# Altium PCB PCB_2022-01-01_2024-03-15.pcbdoc
Units mil, origin at the board's own origin, x right, y up, seen from the top; angles counter-clockwise.
Board outline 11779.35 x 5222.6 mil, 2 copper layers (Top Layer, Bottom Layer); 63 components, 51 nets, 145 pads, 18 vias.
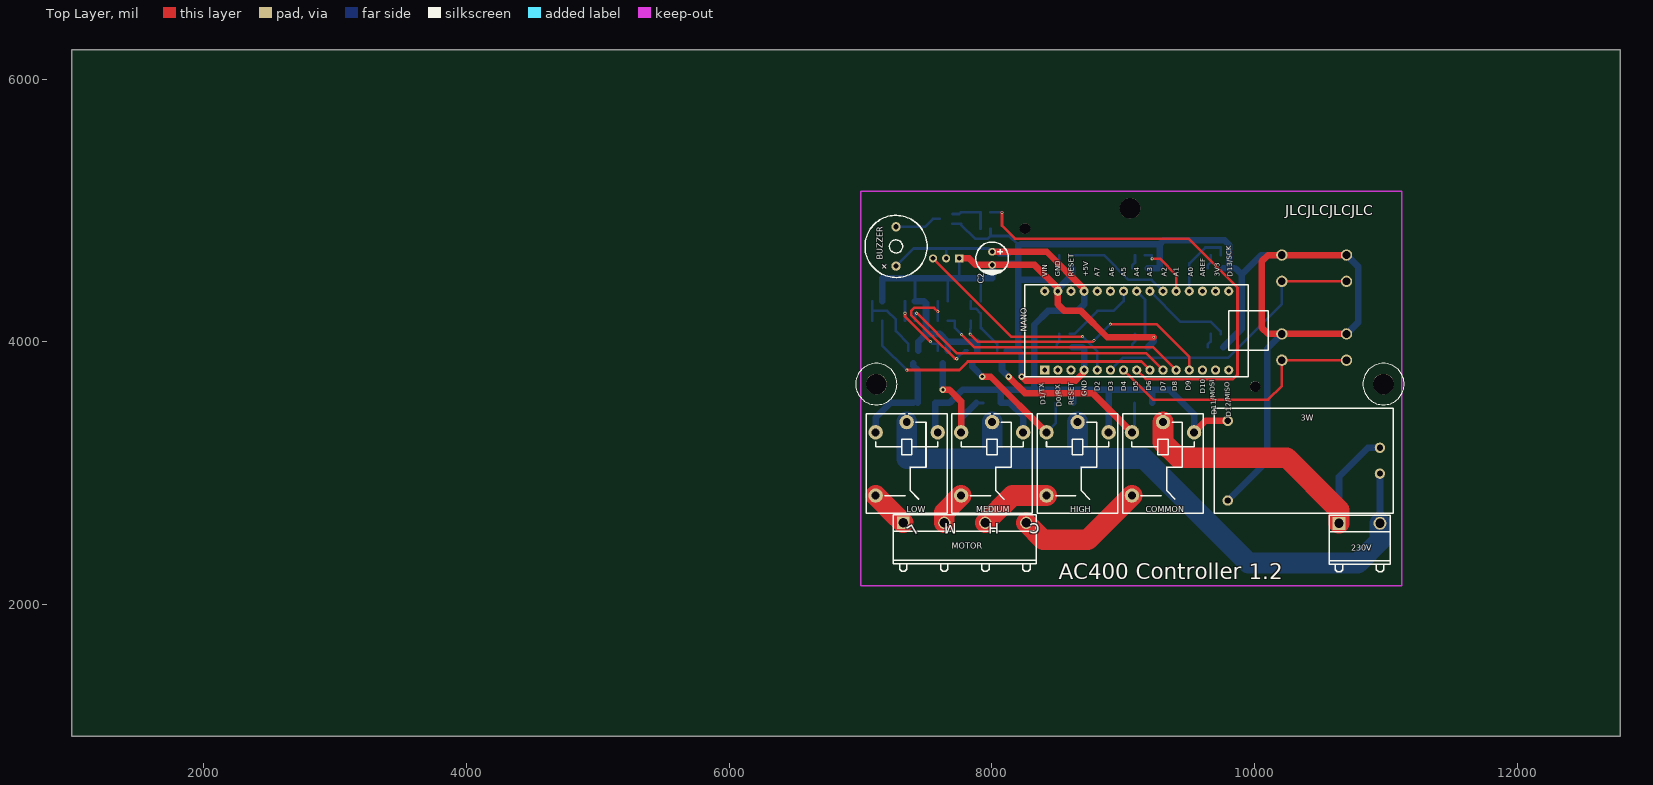
[diagram p0: Top Layer view]
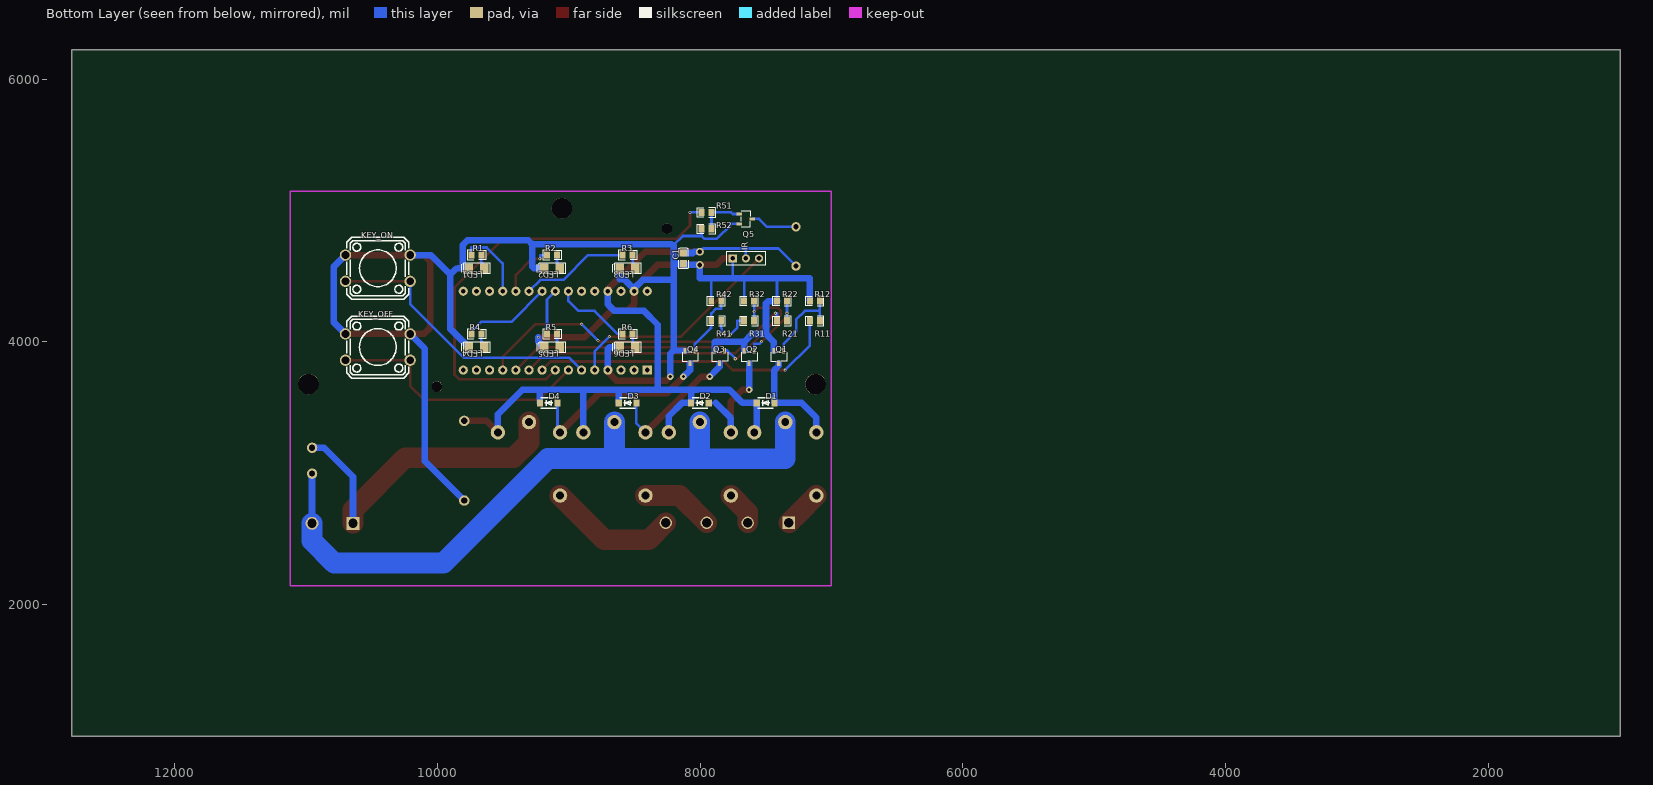
[diagram p1: Bottom Layer view, seen from below]

## Layer stack, top to bottom
Top Layer: signal copper (thickness not stored)
Dielectric: dielectric 12.6, FR-4, Dk 4.8
Bottom Layer: signal copper (thickness not stored)

## Board outline
12779.35,1000 1000,1000 1000,6222.6 12779.35,6222.6

## Components (designator, comment, footprint, x,y, rotation, side; value= is the part's Value field where it differs from the comment)
3W "HLK-PM01" PWRM-TH_HLK-PM01 10372.72,3096.93 r180 top
230V "HDR-F-2.54_1x2" CONN-TH_3(2)P-P3.96_B3PS-VH 10640.44,2620.55 r0 top
BUZZER "TMB12A05" BUZ-TH_BD12.0-P7.60-D0.6-FD 7270.36,4726.85 r90 top
C1 "0.1u" C0805 8126.46,4636.3 r270 bottom
C2 "100u" CAP-D6.3×F2.5 8001.46,4636.3 r270 top
COMMON "SRD-DC5V-SL-A" RELAY-TH_SRD-DCXXV-SL-A 9301.46,3111.3 r270 top
D1 "1N4007W" SOD-123_L2.8-W1.8-LS3.7-RD 7501.46,3536.3 r0 bottom
D2 "1N4007W" SOD-123_L2.8-W1.8-LS3.7-RD 8001.46,3536.3 r0 bottom
D3 "1N4007W" SOD-123_L2.8-W1.8-LS3.7-RD 8551.46,3536.3 r0 bottom
D4 "1N4007W" SOD-123_L2.8-W1.8-LS3.7-RD 9151.46,3536.3 r0 bottom
HIGH "SRD-DC5V-SL-A" RELAY-TH_SRD-DCXXV-SL-A 8651.46,3111.3 r270 top
IR "HDR-M-2.54_1x3" HDR-M-2.54_1X3 7651.46,4636.3 r0 bottom
KEY_OFF "K4-12×12_TH" KEY-TH_4P-L12.0-W12.0-P5.00-LS12.5 10451.46,3961.3 r0 bottom
KEY_ON "K4-12×12_TH" KEY-TH_4P-L12.0-W12.0-P5.00-LS12.5 10451.46,4561.3 r0 bottom
LED1 "LED-0805_R" LED1206-FD_GREEN 9701.46,4561.3 r180 bottom
LED2 "LED-0805_R" LED1206-FD_GREEN 9126.46,4561.3 r180 bottom
LED3 "LED-0805_R" LED1206-FD_GREEN 8551.46,4561.3 r180 bottom
LED4 "LED-0805_R" LED1206-FD_GREEN 9701.46,3961.3 r180 bottom
LED5 "LED-0805_R" LED1206-FD_GREEN 9126.46,3961.3 r180 bottom
LED6 "LED-0805_R" LED1206-FD_GREEN 8551.46,3961.3 r180 bottom
LOW "SRD-DC5V-SL-A" RELAY-TH_SRD-DCXXV-SL-A 7351.46,3111.3 r270 top
MEDIUM "SRD-DC5V-SL-A" RELAY-TH_SRD-DCXXV-SL-A 8001.46,3111.3 r270 top
MOTOR "HDR-F-2.54_1x4" CONN-TH_7(4)P-P3.96_B3PS-VH 7325.48,2624.49 r0 top
NANO "ARDUINO_NANO" ARDUINO_NANO 9101.46,4086.3 r90 top
Q1 "S8050-J3Y 800MA" SOT-23-3_L2.9-W1.6-P1.90-LS2.8-BR 7401.46,3886.3 r270 bottom
Q2 "S8050-J3Y 800MA" SOT-23-3_L2.9-W1.6-P1.90-LS2.8-BR 7626.46,3886.3 r270 bottom
Q3 "S8050-J3Y 800MA" SOT-23-3_L2.9-W1.6-P1.90-LS2.8-BR 7851.46,3886.3 r270 bottom
Q4 "S8050-J3Y 800MA" SOT-23-3_L2.9-W1.6-P1.90-LS2.8-BR 8076.46,3886.3 r270 bottom
Q5 "S8050-J3Y 800MA" SOT-23-3_L2.9-W1.6-P1.90-LS2.8-BR 7651.46,4936.3 r180 bottom
R1 "200" R0805 9701.46,4661.3 r180 bottom
R2 "200" R0805 9126.46,4661.3 r180 bottom
R3 "200" R0805 8551.46,4661.3 r180 bottom
R4 "200" R0805 9701.46,4061.3 r180 bottom
R5 "200" R0805 9126.46,4061.3 r180 bottom
R6 "200" R0805 8551.46,4061.3 r180 bottom
R11 "4k7" R0805 7126.46,4161.3 r0 bottom
R12 "20k" R0805 7126.46,4311.3 r0 bottom
R21 "4k7" R0805 7376.46,4161.3 r0 bottom
R22 "20k" R0805 7376.46,4311.3 r0 bottom
R31 "4k7" R0805 7626.46,4161.3 r0 bottom
R32 "20k" R0805 7626.46,4311.3 r0 bottom
R41 "4k7" R0805 7876.46,4161.3 r0 bottom
R42 "20k" R0805 7876.46,4311.3 r0 bottom
R51 "4k7" R0805 7951.46,4986.3 r0 bottom
R52 "20k" R0805 7951.46,4861.3 r0 bottom
? "" ? 9784.54,5064.1 r0 top
? "" ? 11092.5,4858.78 r0 top
? "" ? 11364.4,4536.3 r0 top
? "" ? 10139.1,4258.82 r0 top
? "" ? 9947.04,4449.35 r0 top
? "" ? 9659.54,4363.57 r0 top
? "" ? 9358.87,4321.29 r0 top
? "" ? 8147.43,2421.28 r0 top
? "" ? 9056,3854.21 r0 top
? "" ? 9065.84,2020.31 r0 top
? "" ? 7065.84,3616.25 r0 top
? "" ? 11149.19,4443.54 r0 top
? "" ? 6933.21,4447.48 r0 top
? "" ? 11277.76,2917.95 r0 top
? "" ? 6806.4,3644.33 r0 top
? "" ? 10440.99,2346.32 r0 top
? "" ? 8031.23,5363.15 r0 top
? "" ? 10093.59,5374.95 r0 top

## Footprints (in the part's own frame and the unit in brackets; to place one, negate y for a bottom-side part, rotate by r counter-clockwise, add the part's x,y. Pads: shape width x height; smd on the part's side, far side on the other; paste and mask are expansions set on the pad)
ARDUINO_NANO [mil]
  rect 70x70 hole 36 paste+0 mask+4: 1(-300,700)
  round 70 hole 36 paste+0 mask+4: 2(-300,600) 3(-300,500) 4(-300,400) 5(-300,300) 6(-300,200) 7(-300,100) 8(-300,0) 9(-300,-100) 10(-300,-200) 11(-300,-300) 12(-300,-400) 13(-300,-500) 14(-300,-600) 15(-300,-700) 16(300,-700) 17(300,-600) 18(300,-500) 19(300,-400) 20(300,-300) 21(300,-200) 22(300,-100) 23(300,0) 24(300,100) 25(300,200) 26(300,300) 27(300,400) 28(300,500) 29(300,600) 30(300,700)
  silkscreen extent -350,-1000 350,850
BUZ-TH_BD12.0-P7.60-D0.6-FD [mm]
  round 1.8 hole 1 paste+0 mask+0.051: 1(-3.8,0) 2(3.8,0)
  silkscreen extent -6,-6 6,6
C0805 [mm]
  rect 1.41x1.35 smd paste-100 mask+0.051: 1(1.03,0) 2(-1.03,0)
  silkscreen extent -1.96,-0.9 1.96,0.9
CAP-D6.3×F2.5 [mil]
  round 60 hole 36 paste+0 mask+4: 1(-50,0) 2(50,0)
  silkscreen extent -124,-124 125,124
CONN-TH_3(2)P-P3.96_B3PS-VH [mm]
  rect 2.5x2.5 hole 1.8 paste+0 mask+0.102: 1(0,0)
  round 2.5 hole 1.8 paste+0 mask+0.102: 2(7.92,0)
  silkscreen extent -1.91,-9.37 9.91,1.53
CONN-TH_7(4)P-P3.96_B3PS-VH [mm]
  rect 2.4x2.4 hole 1.8 paste+0 mask+0.05: 1(0,0)
  round 2.4 hole 1.8 paste+0 mask+0.05: 2(7.92,0) 3(15.84,0) 4(23.76,0)
  silkscreen extent -1.93,-9.37 25.65,1.53
HDR-M-2.54_1X3 [mil]
  rect 62x62 hole 35 paste+0 mask+2: 1(100,0)
  round 62 hole 35 paste+0 mask+2: 2(0,0) 3(-100,0)
  silkscreen extent -150,-50 150,50
KEY-TH_4P-L12.0-W12.0-P5.00-LS12.5 [mm]
  round 2.2 hole 1.5 paste+0 mask+0.051: 1(6.251,-2.54) 2(-6.251,-2.54) 3(6.251,2.54) 4(-6.251,2.54)
  silkscreen extent -5.99,-6 5.99,6
LED1206-FD_GREEN [mm]
  rect 1.635x1.87 smd paste-100 mask+0.051: 1(1.517,0) 2(-1.518,0)
  silkscreen extent -2.98,-1.06 2.58,1.05
PWRM-TH_HLK-PM01 [mm]
  round 2 hole 1.2 paste+0 mask+0.051: 1(-14.7,2.5) 2(-14.7,-2.5) 3(14.7,7.7) 4(14.7,-7.7)
  silkscreen extent -17.24,-10.12 17.3,10.2
R0805 [mil]
  rect 44.59x54.21 smd paste-3937.01 mask+2: 1(38.04,0) 2(-38.04,0)
  silkscreen extent -69,-36 69,36
RELAY-TH_SRD-DCXXV-SL-A [mil]
  round 110 hole 60 paste+0 mask+2: 1(-200.79,-236.22) 2(279.53,-236.2) 4(-200.79,236.22) 5(-279.53,0)
  silkscreen extent -342,-307 413,307
SOD-123_L2.8-W1.8-LS3.7-RD [mm]
  rect 1.2x1.4 smd paste+0 mask+0.102: 1(1.7,0) 2(-1.7,0)
  silkscreen extent -1.5,-1 1.5,1
SOT-23-3_L2.9-W1.6-P1.90-LS2.8-BR [mm]
  rect 1.07x0.6 smd paste+0 mask+0.051: 1(-1.235,0.95) 2(-1.235,-0.95) 3(1.235,0)
  silkscreen extent -0.88,-1.54 0.88,1.54
? [mil]

## Free pads (board coordinates)
  round 157.48 hole 157.48 unplated paste+0: ""(7120.75,3679.61) ""(9051.07,5018.19) ""(10979.02,3679.61)
  round 80 hole 80 unplated paste+0: ""(8251.46,4861.3) ""(10001.46,3661.3)

## Via types
v1: diameter 24.02, hole 12.01, Top Layer to Bottom Layer, tented both sides, 13 vias
v2: diameter 50, hole 24.02, Top Layer to Bottom Layer, tented both sides, 4 vias
v3: diameter 20.08, hole 12.01, Top Layer to Bottom Layer, tented both sides, 1 vias

## Nets (pads, with @x,y where several pads share a name; then routed paths per layer and width w, separated by ;. In a path a pad name is that pad's centre, name@x,y a point inside that pad or via, vN(x,y) a via of type N, cw(c..) or ccw(c..) an arc to the next point about the centre after c; other vN are vias at no path point)
3W_1: 3W.1 230V.2 HIGH.5 LOW.5 MEDIUM.5 | length 5364.9
  Bottom Layer w50: 3W.1 10952.26,2997.7 230V.2@10952.26,2620.55
  Bottom Layer w157.48: LOW.5 7351.46,3111.3 8001.46,3113.8 ; MEDIUM.5@8001.46,3370.91 MEDIUM.5 8001.46,3113.8 ; 8651.46,3113.8 HIGH.5 ; 230V.2@10952.26,2620.55 10952.26,2487.1 10784.16,2319 9952.56,2319 9157.76,3113.8 8001.46,3113.8
3W_2: 3W.2 230V.1 COMMON.5 | length 2565
  Top Layer w157.48: COMMON.5 9301.46,3236.3 9418.96,3118.8 10243.96,3118.8 10640.46,2722.3 230V.1@10640.46,2620.6
  Bottom Layer w50: 230V.1@10640.44,2620.55 10640.44,2975.28 10860.51,3195.35 3W.2
+5V: 3W.4 BUZZER.1 C1.2 C2.1 COMMON.4 D1.1 D2.1 D3.1 D4.1 HIGH.4 IR.2 LOW.4 MEDIUM.4 NANO.27 | length 7265.6
  Top Layer w50: C2.1 8417.33,4686.3 8701.46,4402.17 NANO.27 ; COMMON.4 9625.67,3400.08 3W.4
  Bottom Layer w20: BUZZER.1 7404.42,4711.3 7651.46,4711.3 ; IR.2@7651.46,4642.3 7651.46,4711.3 ; IR.2@7651.46,4642.34 7651.46,4711.3 ; C2.1 7976.46,4711.3 7651.46,4711.3
  Bottom Layer w50: LOW.4 7568.39,3331.38 D1.1 7637.02,3536.3 ; 7637.06,3536.3 7676.46,3536.3 7776.46,3636.3 8068.36,3636.3 D2.1 ; IR.2 IR.2@7651.46,4642.34 ; 7993.84,3636.3 8409.07,3636.3 ; C2.1 8045.43,4686.3 8054.88,4676.85 C1.2 ; D2.1 8137.02,3536.3 8237.68,3435.64 MEDIUM.4 ; 8321.13,3636.3 8321.26,3642.4 8321.26,4131.1 8426.46,4236.3 8651.46,4236.3 8701.46,4286.3 NANO.27 ; 8401.46,3636.3 8618.36,3636.3 D3.1 ; 8536.26,3611.3 8536.26,3636.3 8887.66,3636.3 ; COMMON.4 9537.66,3450.1 9351.46,3636.3 9218.36,3636.3 ; 8887.66,3636.3 9218.36,3636.3 ; 8887.66,3636.3 HIGH.4 8887.66,3636.3 ; 9218.36,3636.3 D4.1 9218.36,3636.3
BUZZER_2: BUZZER.2 Q5.3 | length 357.3
  Bottom Layer w20: BUZZER.2@7270.36,4876.45 7491.83,4876.45 7551.68,4936.3 Q5.3
D1_2: D1.2 LOW.1 Q1.3 | length 793.4
  Bottom Layer w20: 7401.46,3536.3 D1.2
  Bottom Layer w50: LOW.1@7115.26,3312.1 7115.26,3425.1 7226.46,3536.3 7401.46,3536.3 ; Q1.3 7401.46,3819.37 7434.53,3786.3 D1.2
D2_2: D2.2 MEDIUM.1 Q2.3 | length 938.2
  Top Layer w50: v2(7626.46,3636.3) 7676.46,3636.3 7765.26,3547.5 MEDIUM.1@7765.26,3312.1
  Bottom Layer w20: 7880.81,3536.3 D2.2
  Bottom Layer w50: v2(7626.46,3636.3) Q2.3 ; MEDIUM.1 7765.24,3420.73 7880.81,3536.3
D3_2: D3.2 HIGH.1 Q3.3 | length 1050.3
  Top Layer w50: v2(7926.46,3736.3) 7991.06,3736.3 HIGH.1@8415.26,3312.1
  Bottom Layer w20: HIGH.1 8484.53,3381.38 D3.2
  Bottom Layer w50: 7851.46,3811.3 Q3.3 ; 7851.46,3811.85 7876.24,3786.52 v2(7926.46,3736.3)
D4_2: COMMON.1 D4.2 Q4.3 | length 1469.1
  Top Layer w50: v2(8126.46,3736.3) 8251.46,3611.3 8766.06,3611.3 COMMON.1@9065.26,3312.1
  Bottom Layer w20: COMMON.1 9084.53,3331.38 D4.2
  Bottom Layer w50: Q4.3 8076.46,3785.32 v2(8126.46,3736.3)
GND: 3W.3 C1.1 C2.2 IR.1 KEY_OFF.1 KEY_OFF.2 KEY_ON.1 KEY_ON.2 LED1.2 LED2.2 LED3.2 LED4.2 LED5.2 LED6.2 NANO.4 NANO.29 Q1.2 Q2.2 Q3.2 Q4.2 Q5.2 R12.1 R22.1 R32.1 R42.1 R52.1 | length 15695.9
  Top Layer w50: IR.1 7827.47,4636.3 7877.47,4586.3 C2.2 8324.58,4586.3 8501.46,4409.42 NANO.29 8501.46,4286.3 8551.46,4236.3 8676.46,4236.3 8876.76,4036 v3(9231.87,4035.99) ; v2(8226.46,3736.3) 8256.64,3706.12 8637.67,3706.12 8701.46,3769.91 NANO.4 ; KEY_OFF.1 KEY_OFF.2 10101.46,4061.3 10051.46,4111.3 10051.46,4611.3 10101.46,4661.3 KEY_ON.2 KEY_ON.1
  Bottom Layer w20: R22.1 7414.5,4486.3 ; R32.1 7664.5,4486.3 ; Q5.2 7766.16,4898.9 7766.16,4891.8 7871.66,4786.3 7969.06,4786.3 7989.46,4806.7 8131.06,4806.7 8201.46,4736.3 ; 7751.46,4486.3 IR.1 ; R42.1 7914.5,4486.3 ; 7989.5,4806.66 R52.1
  Bottom Layer w50: R12.1 7164.5,4486.3 8001.46,4486.3 C2.2 8126.46,4586.3 C1.1@8126.46,4595.8 ; R22.1 7448.16,4311.3 7481.81,4311.3 7498.55,4294.56 7498.55,4060.69 ; Q1.2 7438.86,4001 7498.55,4060.69 ; Q2.2 7663.86,4001 ; Q3.2 7888.86,4001 7888.47,4001.39 7664.25,4001.39 7663.86,4001 ; Q4.2@8113.46,3934.92 8201.46,3936.3 ; C1.1 8201.46,4595.42 ; 8201.46,4473.23 8201.46,3936.3 ; 8202.46,4472.3 8436.46,4471.85 8501.46,4406.95 NANO.29@8501.46,4396.34 ; v2(8226.46,3736.3) 8226.46,3911.3 8201.46,3936.3 ; NANO.29 NANO.29@8501.46,4396.34 ; LED6.2 8688.4,3961.3 8701.46,3948.24 NANO.4 ; LED3.2 8611.2,4479.48 8578.46,4479.48 8501.46,4402.11 NANO.29@8501.46,4396.34 ; LED5.2 9231.87,4006.97 v3(9231.87,4035.99) ; LED2.2 9263.4,4561.3 9275.22,4573.12 9275.22,4742.18 9307.2,4774.16 9769.36,4774.16 9806.88,4736.64 9806.88,4561.3 ; 9275.46,4742.18 8219.46,4742.18 8201.46,4736.3 8201.46,3936.3 ; LED4.2 9901.46,4101.6 9901.46,4516 10048.26,4661.3 KEY_ON.2 ; LED1.2 9806.88,4561.3 ; 3W.3 10093.75,3093.55 10093.75,3949.69 KEY_OFF.2 ; 9838.4,4561.3 9806.88,4561.3 ; 9856.12,4556.64 9901.46,4511.3 ; KEY_OFF.1 10788.24,4151.98 10788.24,4570.62 KEY_ON.1 ; 7498.55,4060.69 7604.17,4060.69 7663.86,4001
LED1_1: LED1.1 R1.1 | length 109
  Bottom Layer w20: LED1.1 9641.72,4582.39 9663.42,4604.09 R1.1
LED2_1: LED2.1 R2.1 | length 109
  Bottom Layer w20: LED2.1 9066.72,4582.39 9088.42,4604.09 R2.1
LED3_1: LED3.1 R3.1 | length 109
  Bottom Layer w20: LED3.1 8491.72,4582.39 8513.42,4604.09 R3.1
LED4_1: LED4.1 R4.1 | length 109
  Bottom Layer w20: LED4.1 9641.72,3982.39 9663.42,4004.09 R4.1
LED5_1: LED5.1 R5.1 | length 109
  Bottom Layer w20: LED5.1 9066.72,3982.39 9088.42,4004.09 R5.1
LED6_1: LED6.1 R6.1 | length 109
  Bottom Layer w20: LED6.1 8491.72,3982.39 8513.42,4004.09 R6.1
MOTOR_1: LOW.2 MOTOR.1 | length 296.1
  Top Layer w157.48: LOW.2 7251.46,2695.57 7322.54,2624.49 MOTOR.1
MOTOR_2: MEDIUM.2 MOTOR.2 | length 260.3
  Top Layer w157.48: MOTOR.2 7637.29,2703.8 MEDIUM.2
MOTOR_3: HIGH.2 MOTOR.3 | length 552.1
  Top Layer w157.48: MOTOR.3 8156.36,2831.8 HIGH.2
MOTOR_4: COMMON.2 MOTOR.4 | length 997.8
  Top Layer w157.48: MOTOR.4 8390.83,2494.57 8728.05,2494.57 COMMON.2
NANO_1: NANO.1
NANO_2: NANO.2
NANO_3: NANO.3
NANO_5: IR.3 NANO.5 | length 1686
  Top Layer w20: IR.3 8146.83,4040.93 v1(8690.09,4040.93)
  Bottom Layer w20: v1(8690.09,4040.93) 8801.46,3929.56 NANO.5
NANO_6: KEY_ON.3 KEY_ON.4 NANO.6 | length 2176.7
  Top Layer w20: KEY_ON.4 KEY_ON.3
  Bottom Layer w20: NANO.6 8994.97,3879.81 9796.25,3879.81 10205.36,4288.92 KEY_ON.4
NANO_7: KEY_OFF.3 KEY_OFF.4 NANO.7 | length 2028.4
  Top Layer w20: NANO.7 9226.46,3561.3 10101.46,3561.3 10205.36,3665.2 KEY_OFF.4 KEY_OFF.3
NANO_8: NANO.8 R51.1 | length 3646.1
  Top Layer w20: v1(8076.46,4986.3) 8076.46,4885.3 8175.46,4786.3 9495.16,4786.3 9867.76,4413.7 9867.76,3752 9832.46,3716.7 9171.06,3716.7 NANO.8
  Bottom Layer w20: R51.1 v1(8076.46,4986.3)
NANO_9: NANO.9 R11.1 | length 2355.4
  Top Layer w20: v1(7352.66,3786.48) 7751.66,3786.5 7816.56,3851.4 9136.36,3851.4 NANO.9
  Bottom Layer w20: R11.1 7164.5,3974.64 v1(7352.66,3786.48)
NANO_10: NANO.10 R21.1 | length 2123.8
  Top Layer w20: v1(7426.58,4219.2) 7429.48,4219.2 7735.56,3913.12 9174.64,3913.12 NANO.10
  Bottom Layer w20: R21.1 7414.5,4218.51 7425.89,4218.51 v1(7426.58,4219.2)
NANO_11: NANO.11 R31.1 | length 1923
  Top Layer w20: v1(7769.3,4056.5) 7865.14,3960.66 9227.1,3960.66 NANO.11
  Bottom Layer w20: R31.1 7716.9,4161.3 7716.9,4108.9 v1(7769.3,4056.5)
NANO_12: NANO.12 R41.2 | length 2055
  Top Layer w20: v1(7834.28,4059.62) 7893.11,4000.79 8766.51,4000.79 v1(8776.74,4011.02) ; v1(8901.46,4136.3) 9251.46,4136.3 9501.46,3886.3 NANO.12
  Bottom Layer w20: v1(7834.28,4059.62) 7834.28,4099.95 7838.42,4104.09 R41.2 ; v1(8776.74,4011.02) 8901.46,4135.74 v1(8901.46,4136.3)
NANO_13: NANO.13
NANO_14: NANO.14
NANO_15: NANO.15
NANO_16: NANO.16
NANO_17: NANO.17
NANO_18: NANO.18
NANO_19: NANO.19 R1.2 | length 556.3
  Bottom Layer w20: NANO.19 9501.46,4597.1 9622.87,4718.51 9739.5,4718.51 R1.2
NANO_20: NANO.20 R2.2 | length 439.3
  Top Layer w20: v1@9218.56,4633.7 9279.06,4633.7 9401.46,4511.3 NANO.20
  Bottom Layer w20: R2.2 9216.9,4661.3 9216.9,4635.28 v1(9218.51,4633.67)
NANO_21: NANO.21 R3.2 | length 825.9
  Bottom Layer w20: R3.2 8851.4,4661.3 9040.35,4472.35 9215.41,4472.35 NANO.21
NANO_22: NANO.22 R4.2 | length 683.3
  Bottom Layer w20: NANO.22 9434.7,4153.06 9665.82,4153.06 9739.5,4079.38 R4.2
NANO_23: NANO.23 R5.2 | length 351.1
  Bottom Layer w20: NANO.23 9164.5,4323.26 R5.2
NANO_24: NANO.24 R6.2 | length 586.8
  Bottom Layer w20: R6.2@8593.16,4061.5 8626.66,4061.5 8801.46,4236.3 8926.46,4236.3 9001.46,4311.3 NANO.24
NANO_25: NANO.25
NANO_26: NANO.26
NANO_28: NANO.28
NANO_30: NANO.30
R11_2: Q1.1 R11.2 R12.2 | length 647.4
  Bottom Layer w20: R11.2 7088.42,4220.57 R12.2 ; 7088.46,4220.6 7088.46,4236.3 7201.46,4236.3 7268.26,4169.5 7268.26,4081.9 7364.06,3986.1 Q1.1
R21_2: Q2.1 R21.2 R22.2 | length 562.8
  Top Layer w20: v1(7338.42,4218.79) 7338.42,4193.83 7529.29,4002.96 v1(7532.22,4002.96)
  Bottom Layer w20: R21.2 v1(7338.42,4218.79) R22.2 ; v1(7532.22,4002.96) 7549.09,3986.09 7589.06,3986.09 Q2.1
R31_2: Q3.1 R31.2 R32.2 | length 997.8
  Top Layer w20: v1(7588.42,4231.09) 7560.17,4259.34 7407.71,4259.34 7386.42,4238.05 7386.42,4202.59 7545.91,4043.1 7548.84,4043.1 7718.96,3872.98 v1(7731.79,3872.98)
  Bottom Layer w20: R31.2 v1(7588.42,4231.09) R32.2 ; v1(7731.79,3872.98) 7793.73,3934.92 Q3.1
R41_1: Q4.1 R41.1 R42.2 | length 487.1
  Bottom Layer w20: R42.2 7838.42,4254.09 7878.92,4254.09 7914.5,4218.51 R41.1 7914.5,4104.09 7921.06,4104.09 8039.06,3986.09 Q4.1
R51_2: Q5.1 R51.2 R52.2 | length 343.6
  Bottom Layer w20: Q5.1 7751.25,4973.7 7763.85,4986.3 R51.2 R52.2

## Silkscreen, mask and mechanical layers (free items; w line width, h text height)
Top Overlay:
  circle w7.87: c10979.02,3679.61 r157.48
  circle w7.87: c7120.75,3679.61 r157.48
  text "JLCJLCJLCJLC" at 10231.98,4963.62 h78.74
  text "M" at 7730.99,2621.18 h80 r180
  text "H" at 8053.82,2621.18 h80 r180
  text "C" at 8364.85,2621.18 h80 r180
  text "L" at 7399.96,2615.82 h80 r210
  text "AC400 Controller 1.2" at 8506.98,2193.93 h118.11
Document:
  drawing of 173 lines, arcs and shapes, not listed

## Text inside footprints (layer, text, board x,y; h text height)
BUZZER: Top Overlay "+" at 7218.54,4569.53 h50 r135
NANO: Top Overlay "D1/TX" at 8410.48,3524.34 h40 r95; Top Overlay "GND" at 8521.46,4496.3 h40 r90; Top Overlay "+5V" at 8731.46,4496.3 h40 r90; Top Overlay "D12/MISO" at 9821.43,3429.45 h40 r93; Top Overlay "VIN" at 8421.46,4496.3 h40 r90; Top Overlay "D13/SCK" at 9831.43,4497.35 h40 r93; Top Overlay "GND" at 8721.46,3586.6 h40 r90; Top Overlay "D0/RX" at 8530.51,3507.69 h40 r94; Top Overlay "RESET" at 8623.26,3517.2 h40 r90; Top Overlay "D2" at 8821.46,3625.9 h40 r90; Top Overlay "D3" at 8921.46,3625.9 h40 r90; Top Overlay "D4" at 9021.46,3624.1 h40 r90; Top Overlay "D5" at 9111.46,3625.9 h40 r90; Top Overlay "D6" at 9211.46,3627.7 h40 r90; Top Overlay "D7" at 9321.46,3625.9 h40 r90; Top Overlay "D8" at 9411.46,3625.9 h40 r90; Top Overlay "D9" at 9511.46,3627.7 h40 r90; Top Overlay "D10" at 9621.46,3604.8 h40 r90; Top Overlay "D11/MOSI" at 9711.41,3446.19 h40 r94; Top Overlay "3V3" at 9731.46,4496.3 h40 r90; Top Overlay "AREF" at 9621.46,4496.3 h40 r90; Top Overlay "A0" at 9531.46,4496.3 h40 r90; Top Overlay "A1" at 9421.46,4496.3 h40 r90; Top Overlay "A2" at 9331.46,4496.3 h40 r90; Top Overlay "A3" at 9221.46,4496.3 h40 r90; Top Overlay "A4" at 9121.46,4496.3 h40 r90; Top Overlay "A5" at 9021.46,4496.3 h40 r90; Top Overlay "A6" at 8931.46,4496.3 h40 r90; Top Overlay "A7" at 8821.46,4496.3 h40 r90; Top Overlay "RESET" at 8621.46,4496.3 h40 r90